# EAGLE board TCPIP-2serial (EAGLE 5.07)
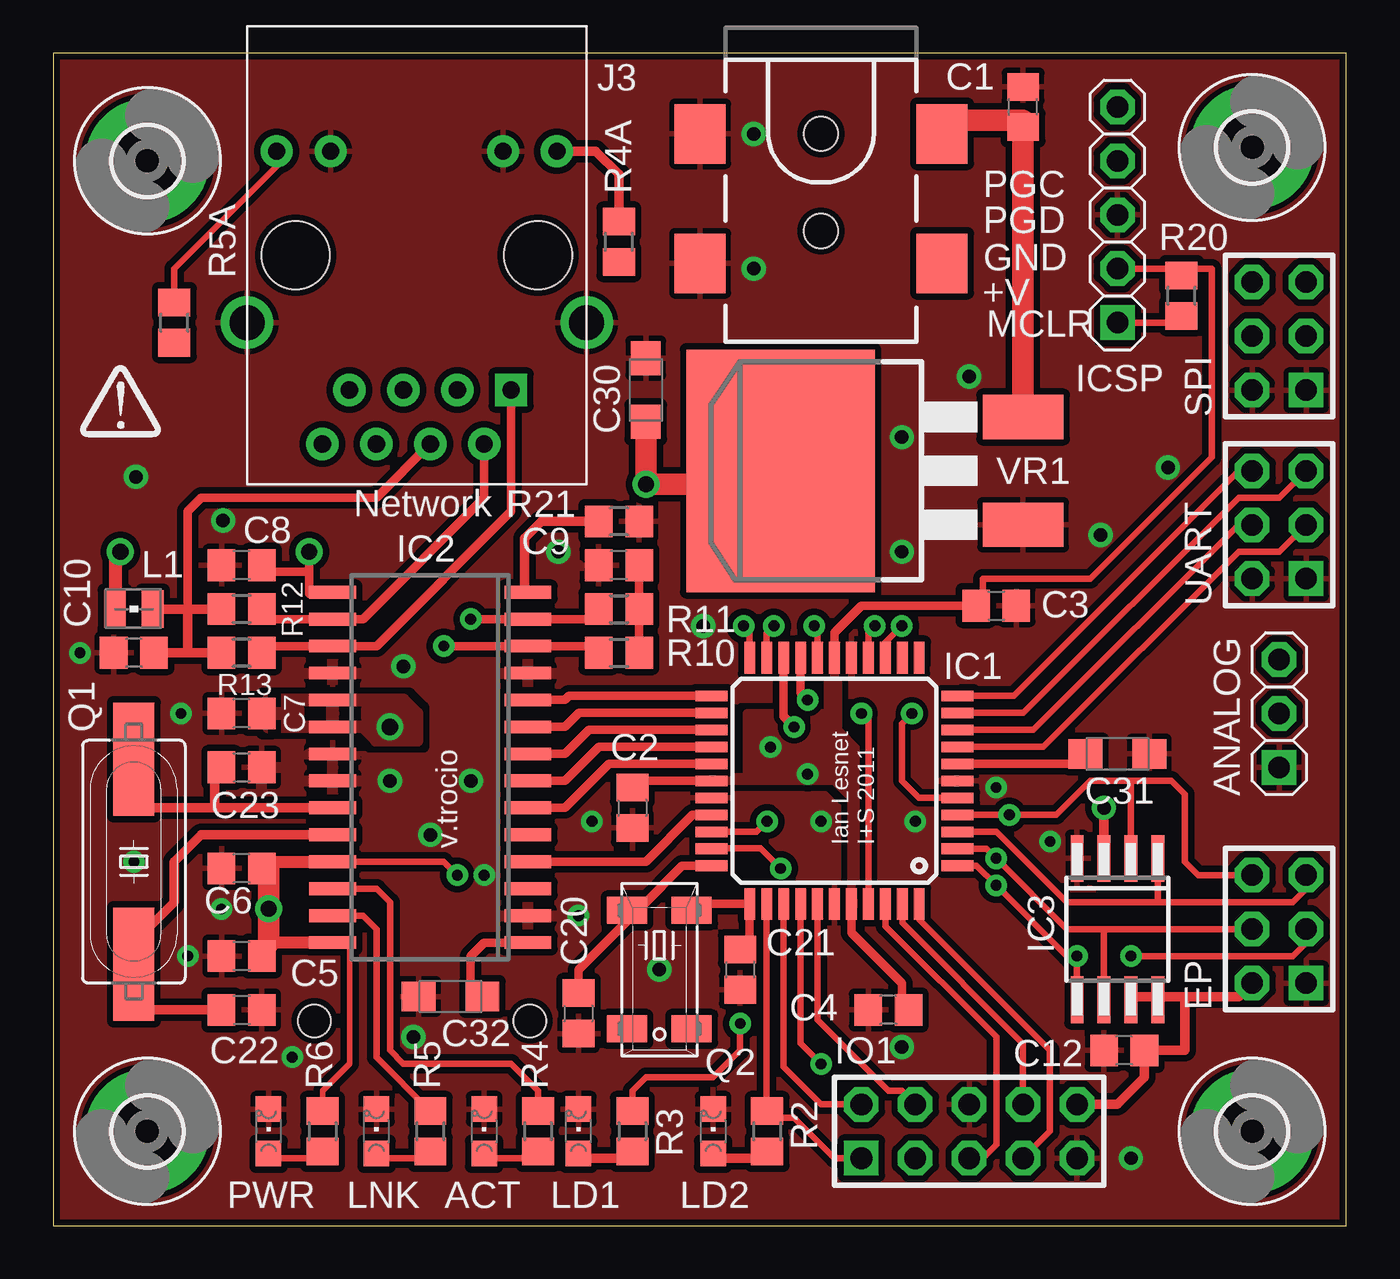
[diagram p0: board, top side]
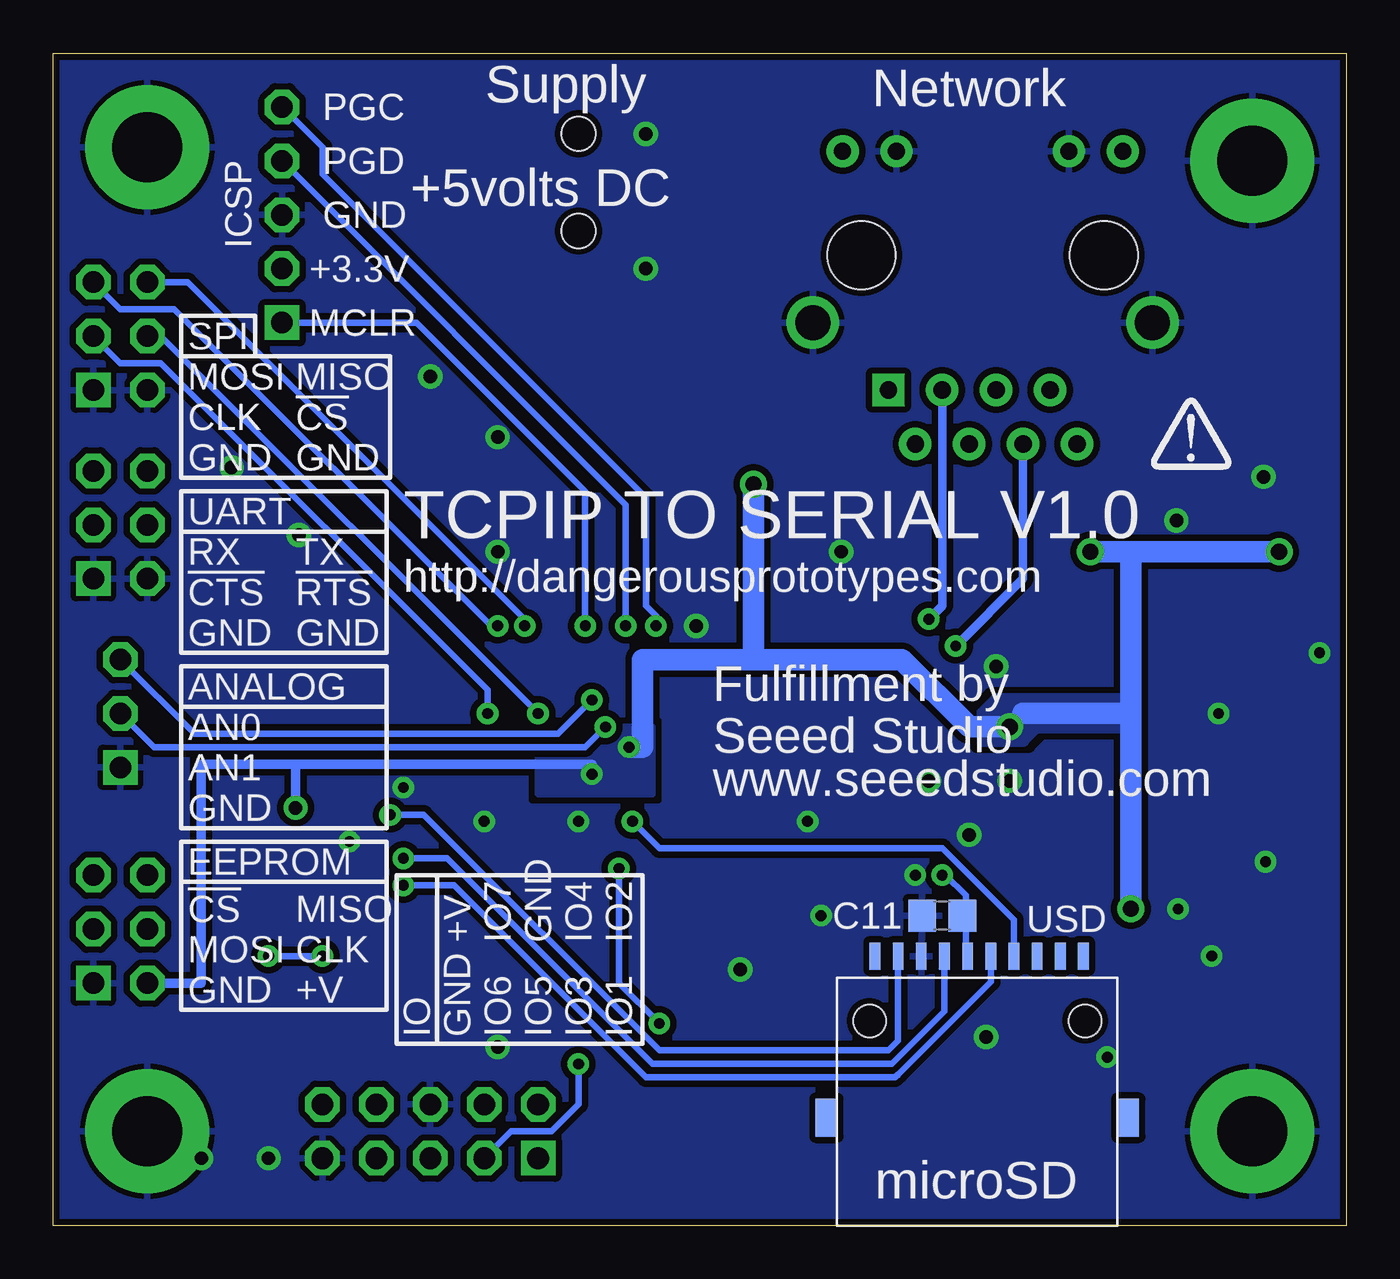
[diagram p1: board, bottom side, seen from below]

Size 60.96 x 55.24 mm. Coordinates in mm from the lower left corner, seen from the top.
Outline: 60.96,55.24 0,55.24 0,0 60.96,0 60.96,55.24
Copper layers (1*16): Top 0.035mm / dielectric 1.5mm / Bottom 0.035mm
Design rules "SparkFun": minimum track width 8mil, minimum drill 20mil, track to track 8mil, track to pad 8mil, pad to pad 8mil, via to via 8mil, smd to smd 8mil, copper to edge 10mil, drill to drill 8mil, minimum pad ring 12mil, minimum via ring 10mil, stop-mask expansion 4mil, vias tented up to drill 25mil, thermal gap 10mil

## Footprints (pad centres in the part's own frame; a part is rotated, then mirrored left to right if it is on the bottom)
CHIPLED_0805 = smd 1.2 x 1.2: A 0,-1.05; C 0,1.05
1X03-S = drill 1.016 square: 1 -2.54,0 | drill 1.016 octagon: 2 0,0; 3 2.54,0
C0805 = smd 1.3 x 1.5: 1 -0.95,0; 2 0.95,0
SMC_A = smd 1.6 x 1.4: + -1.5,0; - 1.5,0
2X03 = drill 1.016 square: 1 -2.54,-1.27 | drill 1.016 octagon: 2 -2.54,1.27; 3 0,-1.27; 4 0,1.27; 5 2.54,-1.27; 6 2.54,1.27
3,3-PAD = drill 3.3 pad 5.842 round: B3,3 0,0
TQFP44 = smd 1.5 x 0.5: 1 -5.8,4; 2 -5.8,3.2; 3 -5.8,2.4; 4 -5.8,1.6; 5 -5.8,0.8; 6 -5.8,0; 7 -5.8,-0.8; 8 -5.8,-1.6; 9 -5.8,-2.4; 10 -5.8,-3.2; 11 -5.8,-4; 23 5.8,-4; 24 5.8,-3.2; 25 5.8,-2.4; 26 5.8,-1.6; 27 5.8,-0.8; 28 5.8,0; 29 5.8,0.8; 30 5.8,1.6; 31 5.8,2.4; 32 5.8,3.2; 33 5.8,4 | smd 0.5 x 1.5: 12 -4,-5.8; 13 -3.2,-5.8; 14 -2.4,-5.8; 15 -1.6,-5.8; 16 -0.8,-5.8; 17 0,-5.8; 18 0.8,-5.8; 19 1.6,-5.8; 20 2.4,-5.8; 21 3.2,-5.8; 22 4,-5.8; 34 4,5.8; 35 3.2,5.8; 36 2.4,5.8; 37 1.6,5.8; 38 0.8,5.8; 39 0,5.8; 40 -0.8,5.8; 41 -1.6,5.8; 42 -2.4,5.8; 43 -3.2,5.8; 44 -4,5.8
SO28W = smd 0.6 x 2.2: 1 -8.255,-4.6; 2 -6.985,-4.6; 3 -5.715,-4.6; 4 -4.445,-4.6; 5 -3.175,-4.6; 6 -1.905,-4.6; 7 -0.635,-4.6; 8 0.635,-4.6; 9 1.905,-4.6; 10 3.175,-4.6; 11 4.445,-4.6; 12 5.715,-4.6; 13 6.985,-4.6; 14 8.255,-4.6; 15 8.255,4.6; 16 6.985,4.6; 17 5.715,4.6; 18 4.445,4.6; 19 3.175,4.6; 20 1.905,4.6; 21 0.635,4.6; 22 -0.635,4.6; 23 -1.905,4.6; 24 -3.175,4.6; 25 -4.445,4.6; 26 -5.715,4.6; 27 -6.985,4.6; 28 -8.255,4.6
SO-08M = smd 0.6 x 2.2: 1 -1.905,-3.33; 2 -0.635,-3.33; 3 0.635,-3.33; 4 1.905,-3.33; 5 1.905,3.33; 6 0.635,3.33; 7 -0.635,3.33; 8 -1.905,3.33
1X05-S = drill 1.016 square: 1 -5.08,0 | drill 1.016 octagon: 2 -2.54,0; 3 0,0; 4 2.54,0; 5 5.08,0
2X05 = drill 1.016 square: 1 -5.08,-1.27 | drill 1.016 octagon: 2 -5.08,1.27; 3 -2.54,-1.27; 4 -2.54,1.27; 5 0,-1.27; 6 0,1.27; 7 2.54,-1.27; 8 2.54,1.27; 9 5.08,-1.27; 10 5.08,1.27
POWER_JACK_SMD = smd 2.8 x 2.4: GND 0,-5.7; P$4 6.1,-5.7; VIN0 0,5.7; VIN1 6.1,5.7 | hole 1.6: 0,0; 4.572,0
HR911105A = drill 0.813 pad 1.524 square: 1 4.445,-6.35 | drill 0.813 pad 1.524 round: 2 3.175,-8.89; 3 1.905,-6.35; 4 0.635,-8.89; 5 -0.635,-6.35; 6 -1.905,-8.89; 7 -3.175,-6.35; 8 -4.445,-8.89; 9 6.604,4.902; 10 4.064,4.902; 11 -4.064,4.902; 12 -6.604,4.902 | drill 1.651 pad 2.159 round: 13 8.001,-3.175; 14 -8.001,-3.175 | hole 3.2: 5.715,0; -5.715,0
WE-KI_0805_B = smd 1.02 x 1.78: 1 -0.89,0; 2 0.89,0
HC49UP = smd 5.334 x 1.93: 1 -4.826,0; 2 4.826,0
MM20SS = smd 1.27 x 1.88: 1 -2.794,-1.524; 2 2.794,-1.524; 3 2.794,1.524; 4 -2.794,1.524
R0805 = smd 1.3 x 1.5: 1 -0.95,0; 2 0.95,0
MICROSD = smd 1.27 x 0.508: 1 0,-7.645; 2 0,-6.553; 3 0,-5.461; 4 0,-4.369; 5 0,-3.277; 6 0,-2.184; 7 0,-1.092; 8 0,0; 9 0,-8.738; 10 0,-9.83 | smd 1.778 x 1.016: RSV1 -7.62,2.286; RSV2 -7.62,-11.938 | hole 1.524: -3.048,-9.906; -3.048,0.254
D2PACK = smd 2.083 x 3.81: 1 -2.54,-8.89; 3 2.54,-8.89 | smd 11.43 x 8.89: 2 0,2.54

## Placement (x,y rotation side)
ACT  [CHIPLED_0805]  20.32,4.45 0 top
ANALOG  [1X03-S]  57.78,24.13 90 top
C1  0.1uF  [C0805]  45.72,52.7 90 top
C2  0.1uF  [C0805]  27.3,19.68 270 top
C3  0.1uF  [C0805]  44.45,29.21 0 top
C4  0.1uF  [C0805]  39.37,10.16 180 top
C5  0.1uF  [C0805]  8.89,12.7 180 top
C6  0.1uF  [C0805]  8.89,16.83 180 top
C7  0.1uF  [C0805]  8.89,24.13 180 top
C8  0.1uF  [C0805]  8.89,31.12 180 top
C9  0.1uF  [C0805]  26.67,31.11 180 top
C10  0.1uF  [C0805]  3.81,26.99 180 top
C11  0.1uF  [C0805]  19.05,14.61 180 bottom
C12  0.1uF  [C0805]  50.48,8.26 180 top
C20  27pf  [C0805]  24.77,10 270 top
C21  27pf  [C0805]  32.38,12.06 270 top
C22  27pf  [C0805]  8.89,10.16 0 top
C23  27pf  [C0805]  8.89,21.59 0 top
C30  10uF  [SMC_A]  27.94,39.37 90 top
C31  10uF  [SMC_A]  50.16,22.23 0 top
C32  10uF  [SMC_A]  18.73,10.79 180 top
EP  [2X03]  57.78,13.97 90 top
H1  MOUNT-PAD-ROUND3.3  [3,3-PAD]  4.45,50.16 0 top
H2  MOUNT-PAD-ROUND3.3  [3,3-PAD]  56.52,50.8 0 top
H3  MOUNT-PAD-ROUND3.3  [3,3-PAD]  56.52,4.45 0 top
H4  MOUNT-PAD-ROUND3.3  [3,3-PAD]  4.45,4.45 0 top
IC1  PIC33FJ128GP204  [TQFP44]  36.83,20.95 180 top
IC2  ENC28J60-SO  [SO28W]  17.78,21.59 90 top
IC3  25SM  [SO-08M]  50.16,13.97 180 top
ICSP  [1X05-S]  50.16,47.62 90 top
IO1  [2X05]  43.18,4.45 0 top
J1  POWER_JACKSMD  [POWER_JACK_SMD]  36.2,51.44 270 top
J3  HR911105A  [HR911105A]  17.14,45.72 0 top
L1  [WE-KI_0805_B]  3.81,29.05 0 top
LD1  [CHIPLED_0805]  24.77,4.45 0 top
LD2  [CHIPLED_0805]  31.11,4.45 0 top
LINK  [CHIPLED_0805]  15.24,4.45 0 top
PWR  [CHIPLED_0805]  10.16,4.45 0 top
Q1  25Mhz  [HC49UP]  3.81,17.14 90 top
Q2  32.768khz  [MM20SS]  28.57,12.06 270 top
R1  1K1  [R0805]  87.63,65.41 270 top  (outside the outline)
R2  1K1  [R0805]  33.66,4.45 270 top
R3  1K1  [R0805]  27.3,4.45 270 top
R4  1K1  [R0805]  22.86,4.45 270 top
R4A  1K1  [R0805]  26.67,46.35 90 top
R5  1K1  [R0805]  17.78,4.45 270 top
R5A  1K1  [R0805]  5.71,42.55 90 top
R6  1K1  [R0805]  12.7,4.45 270 top
R10  49R9 1%  [R0805]  26.67,26.99 0 top
R11  49R9 1%  [R0805]  26.67,29.05 0 top
R12  49R9 1%  [R0805]  8.89,29.05 180 top
R13  49R9 1%  [R0805]  8.89,26.99 180 top
R20  2K  [R0805]  53.18,43.81 90 top
R21  2K32  [R0805]  26.67,33.18 180 top
SD  [CHIPLED_0805]  89.53,65.41 180 top  (outside the outline)
SPI  [2X03]  57.78,41.91 90 top
U$1  [DP-LOGO]  1.27,37.15 0 top
U$2  [DP-LOGO-BOTTOM]  5.41,35.61 0 top
UART  [2X03]  57.78,33.02 90 top
USD  MICROSD  [MICROSD]  22.23,12.7 90 bottom
VR1  LD117AD2MTR  [D2PACK]  36.83,35.56 90 top

## Library data of the parts
ACT LD1 LD2 LINK PWR SD = led
ANALOG EP ICSP IO1 SPI UART = pinhead-2
C1-C12 C20-C23 C30-C32 R1-R4 R4A R5 R5A R6 R10-R13 R20 R21 = rcl
H1-H4 = holes
IC1 IC3 = microchip
IC2 = microchip-enc28j60
J1 = SparkFun
J3 = CONNECTER
L1 = wuerth-elektronik
Q1 Q2 = crystal
U$1 = dp_devices
U$2 = DP-logo
USD = Seeed
VR1 = v-reg

## Nets
AN0: ANALOG.3 IC1.19
AN1: ANALOG.2 IC1.20
CCT: C10.1 J3.4 L1.2 R12.2 R13.2
EE-CLK: EP.4 IC1.2 IC3.6 USD.5
EE-CS: EP.5 IC1.3 IC3.1
EE-MISO: EP.6 IC1.4 IC3.2 USD.7
EE-MOSI: EP.3 IC1.1 IC3.5 USD.3
ETH-CLK: IC1.25 IC2.8
ETH-CS: IC1.24 IC2.9
ETH-INT: IC1.30 IC2.4
ETH-MISO: IC1.27 IC2.6
ETH-MOSI: IC1.26 IC2.7
ETH-RST: IC1.23 IC2.10
GND: ACT.C ANALOG.1 C1.2 C2.2 C3.2 C4.2 C5.2 C6.2 C7.2 C8.2 C9.2 C10.2 C11.2 C12.2 C20.2 C21.2 C22.2 C23.2 C30.- C31.- C32.- EP.1 H1.B3,3 H2.B3,3 H3.B3,3 H4.B3,3 IC1.6 IC1.16 IC1.29 IC1.39 IC2.2 IC2.11 IC2.18 IC2.21 IC2.22 IC3.4 ICSP.3 IO1.6 IO1.9 J1.GND J1.P$4 J3.10 J3.11 J3.13 J3.14 LD1.C LD2.C LINK.C PWR.C R21.1 SPI.1 SPI.2 UART.1 UART.2 USD.6 VR1.1
LED1: IC1.32 R3.1
LED_A: IC2.27 R5.1
LED_A2: R5A.1
LED_B: IC2.26 R4.1
LED_B2: R4A.1
LED_LINK: J3.9 R4A.2
LED_STATUS: J3.12 R5A.2
MCLR: IC1.18 ICSP.1 R20.1
N$5: C20.1 IC1.33 Q2.1
N$6: C32.+ IC2.1
N$7: IC2.14 R21.2
N$9: C22.1 IC2.24 Q1.1
N$11: R1.2 SD.A
N$12: C23.1 IC2.23 Q1.2
N$13: LD2.A R2.2
N$14: LINK.A R5.2
N$18: C31.+ IC1.7
N$19: C21.1 IC1.34 Q2.4
N$20: ACT.A R4.2
N$22: C9.1 R10.2 R11.2
N$25: USD.8
N$28: LD1.A R3.2
N$29: PWR.A R6.2
N$34: USD.1
PGC: IC1.22 ICSP.5
PGD: IC1.21 ICSP.4
RA9: IC1.35 IO1.1 R2.1
RB6: IC1.42 IO1.5
RB7: IC1.43 IO1.8
RB8: IC1.44 IO1.7
RC3: IC1.36 IO1.2
RC4: IC1.37 IO1.3
RC5: IC1.38 IO1.4
RD+: IC2.13 J3.3 R11.1
RD-: IC2.12 J3.6 R10.1
SDCS: IC1.31 USD.2
SPI_!SSI: IC1.41 SPI.4
SPI_CLK: IC1.5 SPI.3
SPI_MISO: IC1.15 SPI.6
SPI_MOSI: IC1.14 SPI.5
TD+: IC2.17 J3.1 R13.1
TD-: IC2.16 J3.2 R12.1
UART_!CTS: IC1.8 UART.3
UART_!RTS: IC1.9 UART.4
UART_RX: IC1.10 UART.5
UART_TX: IC1.11 UART.6
V+: C2.1 C3.1 C4.1 C5.1 C6.1 C7.1 C8.1 C11.1 C12.1 C30.+ EP.2 IC1.17 IC1.28 IC1.40 IC2.15 IC2.19 IC2.20 IC2.25 IC2.28 IC3.3 IC3.7 IC3.8 ICSP.2 IO1.10 L1.1 R6.1 R20.2 USD.4 VR1.2
VEXT: C1.1 J1.VIN0 VR1.3

## Tracks (layer width: path | path; a pad name or v marks a point on that pad's centre or on a via)
AN0  (via drill 0.51)
  Top 0.406: IC1.19 35.23,25.09 v35.56,24.77
  Bottom 0.305: v35.56,24.77 36.99,23.34 | 36.99,23.34 | 36.99,23.34 37.15,23.18 54.29,23.18 ANALOG.3
AN1  (via drill 0.51)
  Top 0.406: IC1.20 34.43,23.99 v34.92,23.5
  Bottom 0.305: v34.92,23.5 35.88,22.54 56.2,22.54 ANALOG.2
CCT
  Top 0.406: 6.35,29.05 6.35,33.66 6.99,34.29 15.24,34.29 J3.4
  Top 0.457: 6.35,26.99 R13.2 | 6.35,26.99 6.35,29.05 | 6.35,29.05 R12.2 | 6.35,29.05 L1.2 | C10.1 6.35,26.99
EE-CLK  (via drill 0.51)
  Top 0.305: 49.53,13.97 EP.4 | 49.53,13.97 IC3.6 | 49.53,13.97 47.78,13.97 v44.45,17.3 | IC1.2 44,17.75 v44.45,17.3 | v44.45,17.3
  Bottom 0.305: USD.5 18.95,10.1 21.43,7.62 32.7,7.62 42.39,17.3 v44.45,17.3
EE-CS
  Top 0.305: 52.07,15.24 47.78,15.24 44.47,18.55 IC1.3 | 52.07,15.24 IC3.1 | EP.5 59.05,15.88 58.42,15.24 52.07,15.24
EE-MISO  (via drill 0.51)
  Top 0.305: EP.6 53.98,16.51 53.34,17.14 53.34,20.32 52.7,20.95 50.8,20.95 | 50.8,20.95 48.9,20.95 47.3,19.36 v45.07,19.36 IC1.4 | 50.8,20.95 IC3.2
  Bottom 0.305: USD.7 21.13,8.71 21.59,8.26 32.38,8.26 43.48,19.36 v45.07,19.36
EE-MOSI  (via drill 0.51)
  Top 0.305: IC3.5 v48.26,12.7 47.78,12.7 v44.45,16.03 | v50.8,12.7 58.42,12.7 59.05,13.34 EP.3 | IC1.1 43.53,16.95 v44.45,16.03 | v44.45,16.03
  Bottom 0.305: v48.26,12.7 v50.8,12.7 | USD.3 16.76,11.49 21.11,7.14 | 21.11,7.14 | 21.11,7.14 21.27,6.99 33.02,6.99 42.07,16.03 v44.45,16.03
ETH-CLK
  Top 0.406: IC1.25 25.26,23.36 24.13,22.23 IC2.8
ETH-CS
  Top 0.406: 22.41,23.52 IC2.9 24.13,23.5 24.79,24.16 IC1.24
ETH-INT
  Top 0.406: IC1.30 30.15,19.36 27.94,17.14 IC2.4
ETH-MISO
  Top 0.406: IC1.27 26.2,21.75 24.13,19.68 IC2.6
ETH-MOSI
  Top 0.406: IC1.26 25.73,22.55 24.13,20.95 IC2.7
ETH-RST
  Top 0.406: IC2.10 24.13,24.77 24.32,24.95 IC1.23
GND  (via drill 0.51, 0.64)
  other vias: 8.01,33.22 16.51,26.35 15.88,20.95 19.68,20.95 6.03,24.13 7.94,14.92 11.27,7.94 3.91,35.28 40.01,8.41 46.99,18.1 30.64,28.26 25.4,19.05 3.81,17.14 6.35,12.7 17.78,18.41 20.32,16.51 16.99,8.89 1.27,26.99 40.64,19.05 44.45,20.64 36.2,19.05 53.98,3.17 50.8,3.17 23.81,31.75 40.01,31.75 43.18,40.01 33.02,45.09 33.02,51.44 49.37,32.54 52.55,35.72 40.01,37.15 24.77,14.6 28.57,12.06
  pour Top (isolate 0.305, rank 6): 60.96,0 0,0 0,55.24 60.96,55.24
  pour Bottom (isolate 0.305, rank 6): 60.96,0 0,0 0,55.24 60.96,55.24
  pour Top (isolate 0.254, rank 2): 37.62,26.19 37.62,23.81 38.89,22.38 38.89,14.61 41.27,14.61 41.27,19.05 42.55,20.32 42.55,26.19
  pour Top (isolate 0.254): 31.27,20.32 31.27,20 33.97,20 36.51,17.46 36.51,15.56 36.99,15.56 36.99,19.68 36.83,19.68 36.2,20.32
  pour Top (isolate 0.305): 9.53,31.11 24.77,31.11 24.77,12.06 9.53,12.06 9.53,21.59 11.43,21.59 12.06,22.23 13.97,22.23 14.61,21.59 18.41,21.59 18.41,25.72 9.53,25.72
LED1  (via drill 0.51)
  Top 0.305: IC1.32 31.05,17.78 33.34,17.78 v34.29,16.83 | R3.1 27.3,6.35 27.94,6.99 31.11,6.99 32.38,8.26 v32.38,9.53
  Bottom 0.305: v34.29,16.83 34.29,11.43 v32.38,9.53
LED_A
  Top 0.305: IC2.27 14.61,14.61 15.24,13.97 15.24,7.93 R5.1
LED_B
  Top 0.305: R4.1 22.86,6.35 21.59,7.62 16.51,7.62 15.88,8.26 15.88,15.24 15.24,15.88 IC2.26
LED_LINK
  Top 0.457: J3.9 25.58,50.62 26.67,49.53 R4A.2
LED_STATUS
  Top 0.305: J3.12 10.54,49.91 5.71,45.09 R5A.2
MCLR  (via drill 0.51)
  Top 0.305: IC1.18 36.03,28.11 v35.88,28.26 | R20.1 53.34,42.55 ICSP.1
  Bottom 0.305: ICSP.1 43.81,42.55 35.88,34.61 v35.88,28.26
N$5
  Top 0.406: IC1.33 29.66,16.95 27.78,15.08 Q2.1 27.05,14.35 24.77,12.06 C20.1
N$6
  Top 0.406: IC2.1 20.32,13.34 19.68,12.7 19.68,11.03 C32.+
N$7
  Top 0.457: R21.2 23.02,33.18 22.23,32.38 22.23,30 IC2.14
N$9
  Top 0.457: IC2.24 6.99,18.41 5.71,17.14 5.71,15.24 3.81,13.34 Q1.1 3.81,10.16 C22.1
N$11  (1 unrouted)
N$12
  Top 0.457: 7.62,19.68 3.81,19.68 Q1.2 | 7.62,19.68 IC2.23 | C23.1 7.62,20.95 7.62,19.68
N$13
  Top 0.457: R2.2 33.66,3.17 31.34,3.17 LD2.A
N$14
  Top 0.305: R5.2 17.78,3.17 15.46,3.17 LINK.A
N$18
  Top 0.406: IC1.7 48.2,21.75 C31.+
N$19
  Top 0.406: C21.1 32.83,13.21 IC1.34 30.39,15.15 Q2.4
N$20
  Top 0.305: ACT.A 20.32,3.17 22.54,3.17 R4.2
N$22
  Top 0.406: R10.2 R11.2 C9.1 | C9.1
N$28
  Top 0.457: R3.2 27.3,3.17 24.98,3.17 LD1.A
N$29
  Top 0.305: R6.2 12.7,3.17 10.38,3.17 PWR.A
PGC  (via drill 0.51)
  Top 0.305: IC1.22 32.83,27.97 v32.54,28.26
  Bottom 0.305: v32.54,28.26 32.54,28.73 33.02,29.21 33.02,34.29 48.26,49.53 48.26,50.8 ICSP.5
PGD  (via drill 0.51)
  Top 0.305: IC1.21 33.63,27.91 v33.97,28.26
  Bottom 0.305: v33.97,28.26 33.97,33.97 ICSP.4
RA9
  Top 0.305: 33.63,5.42 IC1.35 | IO1.1 36.83,3.17 34.92,5.08 33.97,5.08
  Top 0.406: 33.63,5.42 R2.1 33.97,5.08
  Top 0.457: R2.1 33.66,5.71
RB6
  Top 0.305: IO1.5 43.81,3.17 44.45,3.81 44.45,8.89 39.23,14.11 IC1.42
RB7
  Top 0.305: IC1.43 40.03,14.26 45.72,8.57 IO1.8
RB8
  Top 0.305: IC1.44 40.83,14.41 46.99,8.26 46.99,4.45 IO1.7
RC3
  Top 0.305: IO1.2 36.2,5.71 34.43,7.48 IC1.36
RC4  (via drill 0.51)
  Top 0.305: IC1.37 35.23,8.59 v36.2,7.62
  Bottom 0.305: IO1.3 39.37,4.45 37.47,4.45 36.2,5.71 v36.2,7.62
RC5
  Top 0.305: IC1.38 36.03,9.69 39.37,6.35 40.01,6.35 IO1.4
RD+  (via drill 0.51)
  Top 0.406: v19.68,28.57 IC2.13 25.24,28.57 R11.1
  Bottom 0.406: J3.3 19.05,29.21 v19.68,28.57
RD-  (via drill 0.51)
  Top 0.406: v18.41,27.3 IC2.12 25.4,27.3 R10.1
  Bottom 0.406: J3.6 15.24,30.48 v18.41,27.3
SDCS  (via drill 0.51)
  Top 0.305: IC1.31 33.16,18.55 v33.66,19.05
  Bottom 0.305: v33.66,19.05 32.38,17.78 19.05,17.78 15.67,14.4 USD.2
SPI_!SSI  (via drill 0.51)
  Top 0.305: IC1.41 38.43,23.82 v38.1,24.13
  Bottom 0.305: SPI.4 55.88,41.91 v38.1,24.13
SPI_CLK  (via drill 0.51)
  Top 0.305: IC1.5 40.8,20.16 40.01,20.95 40.01,23.65 v40.48,24.13
  Bottom 0.305: 40.48,24.61 v40.48,24.13 40.48,25.24 55.88,40.64 57.78,40.64 SPI.3
SPI_MISO  (via drill 0.51)
  Top 0.305: IC1.15 38.43,27.95 v38.73,28.26
  Bottom 0.305: v38.73,28.26 38.73,28.57 54.61,44.45 SPI.6
SPI_MOSI  (via drill 0.51)
  Top 0.305: IC1.14 39.23,27.48 v40.01,28.26
  Bottom 0.305: v40.01,28.26 40.32,28.26 55.24,43.18 57.78,43.18 SPI.5
TD+
  Top 0.406: R13.1 10.16,27.3 IC2.17 15.24,27.3 21.59,33.66 J3.1
TD-
  Top 0.406: R12.1 10.32,28.57 IC2.16 14.61,28.57 20.32,34.29 J3.2
UART_!CTS
  Top 0.305: IC1.8 46.69,22.55 55.88,31.75 57.78,31.75 UART.3
UART_!RTS
  Top 0.305: IC1.9 46.22,23.36 55.88,33.02 UART.4
UART_RX
  Top 0.305: IC1.10 45.74,24.16 55.88,34.29 57.78,34.29 UART.5
UART_TX
  Top 0.305: IC1.11 45.27,24.95 55.88,35.56 UART.6
V+  (via drill 0.51, 0.64, 0.76)
  Top 0.254: R6.1 12.7,6.35 13.97,7.62 13.97,13.34 IC2.28
  Top 0.305: 10.16,31.11 C8.1 | 10.16,30.8 10.16,31.11 | 10.16,31.11 | 12.73,29.84 IC2.15 | ICSP.2 53.34,45.09 R20.2 53.66,45.09 54.61,45.09 54.61,36.2 48.9,30.48 43.81,30.48 43.81,29.21 | v19.05,16.51 18.41,17.14 IC2.25
  Top 0.406: C6.1 10.13,17.04 | IC1.28 27.62,20.95 C2.1 | IC1.17 36.83,27.94 38.1,29.21 C3.1 43.81,29.21 | 12.06,30.8 10.16,30.8 | 12.06,30.8 12.06,29.77 12.68,29.9 12.73,29.84 | v12.06,31.75 12.06,30.8 | C4.1 40.01,10.47 40.01,11.43 37.63,13.8 IC1.40
  Top 0.457: v49.53,19.68 IC3.3 | 50.8,10.79 IC3.7 50.95,10.79 52.07,10.79 | IO1.10 50.16,5.71 51.44,6.99 C12.1 53.34,8.26 53.34,10.79 | 52.07,10.79 IC3.8 | 52.07,10.79 52.07,11.43 | 53.34,10.79 55.88,10.79 EP.2 | 53.34,10.79 52.07,10.79
  Top 0.559: 10.16,17.14 C6.1 10.16,16.82 | 10.16,17.14 IC2.25 | 10.13,17.04 10.13,17.12 10.16,17.14 | C5.1 10.16,13.02 10.16,13.34 IC2.28
  Top 0.61: L1.1 2.92,31.5 v3.17,31.75
  Top 1.016: 10.16,16.82 v10.16,14.92 10.16,13.34 | C30.+ v27.94,34.92 34.29,34.92 VR1.2
  Bottom 0.254: USD.4 17.78,12.62 17.78,12.7 USD.4
  Bottom 0.305: v19.05,16.51 18.89,16.51 17.94,15.56 17.94,14.77 C11.1 17.94,14.44 17.94,12.7 USD.4
  Bottom 0.457: EP.2 53.98,11.43 53.98,21.75 49.53,21.75 | 49.53,21.75 35.56,21.75 v35.56,21.27 | 49.53,21.75 v49.53,19.68
  Bottom 1.016: 10.16,31.75 v3.17,31.75 | 10.16,31.75 v12.06,31.75 | v10.16,14.92 10.16,24.13 | 10.16,24.13 10.16,31.75 | 10.16,24.13 15.24,24.13 | v33.81,22.54 33.18,22.54 33.18,26.67 27.94,26.67 | v15.88,23.5 17.78,23.5 20.95,26.67 27.94,26.67 | 27.94,26.67 v27.94,34.92
  pour Top (isolate 0.254): 32.7,24.13 36.51,24.13 36.51,26.04 36.99,26.04 36.99,23.34 37.94,22.38 37.94,14.61 37.62,14.61 37.62,20.32 37.47,20.32 36.83,20.95 31.11,20.95 31.11,21.11 32.7,21.11
  pour Top (isolate 0.305): 10.16,24.77 16.51,24.77 17.14,24.13 17.14,22.86 15.24,22.86 14.61,23.5 10.16,23.5
  pour Bottom (isolate 0.305): 32.7,20.32 32.7,23.5 38.1,23.5 38.1,20.32
  pour Bottom (isolate 0.305): 10.16,24.77 16.51,24.77 17.14,24.13 17.14,22.86 15.24,22.86 14.61,23.5 10.16,23.5
VEXT
  Top 1.016: J1.VIN0 41.9,52.05 41.91,52.07 45.72,52.07 C1.1 VR1.3

## Text on the board
tPlace: PGC | PGD | GND | +V | MCLR
tNames: APR 2011 | CC-0 | TCPIP TO SERIAL V1.0 | http://dangerousprototypes.com | Network | v.trocio | Ian Lesnet | I+S 2011 | PWR | LNK | ACT | LD1 | LD2
bNames: Network | Supply | PGC | PGD | +5volts DC | GND | ICSP | +3.3V | MCLR | SPI | MISO | MOSI | !CS | CLK | GND | GND | UART | TCPIP TO SERIAL V1.0 | TX | RX | http://dangerousprototypes.com | !RTS | !CTS | GND | GND | Fulfillment by | ANALOG | AN0 | Seeed Studio | AN1 | www.seeedstudio.com | GND | EEPROM | MISO | !CS | IO2 | IO4 | GND | IO7 | +V | CLK | MOSI | +V | GND | IO1 | IO3 | IO5 | IO6 | GND | IO | microSD
tValues: RA0 | RA1 | GND | V+ | GND | RB15 | MCLR | V+ | GND | PGD3 | PGC3
Reference: SUPPLY | NETWORK | +5V DC | ICSP | MISO | MOSI | !CS | CLK | SPI | GND | GND | TX | RX | UART | !RTS | !CTS | GND | GND | AN0 | ANALOG IN | AN1 | GND | MISO | !CS | EEPROM SPI | CLK | MOSI | +V | GND | TCPIP TO SERIAL V1.0 | RC3 | RC5 | GND | RB7 | +V | CC-0 | Ian Lesnet 2011 | INDICATOR | RA9 | RC4 | RB6 | RB8 | GND | http://dangerousprototypes.com | IO
RPpinsReference: RP2 | RP1 | RP0 | RP13 | RP3 | RP15 | RP14 | RP12 | RP16 | RP11 | RP17 | RP18 | RP10 | RP25 | RP24 | RP23 | RP4 | RP22 | RP9 | RP19 | RP20 | RP21 | RP5 | RP6 | RP7 | RP8